# Altium PCB SSFocuser-B-TMC2208-O - 3.9x5.2.PcbDoc
Units mm, origin at the board's own origin, x right, y up, seen from the top; angles counter-clockwise.
Board outline 52 x 39 mm, 2 copper layers (Top Layer, Bottom Layer); 47 components, 44 nets, 214 pads, 52 vias.
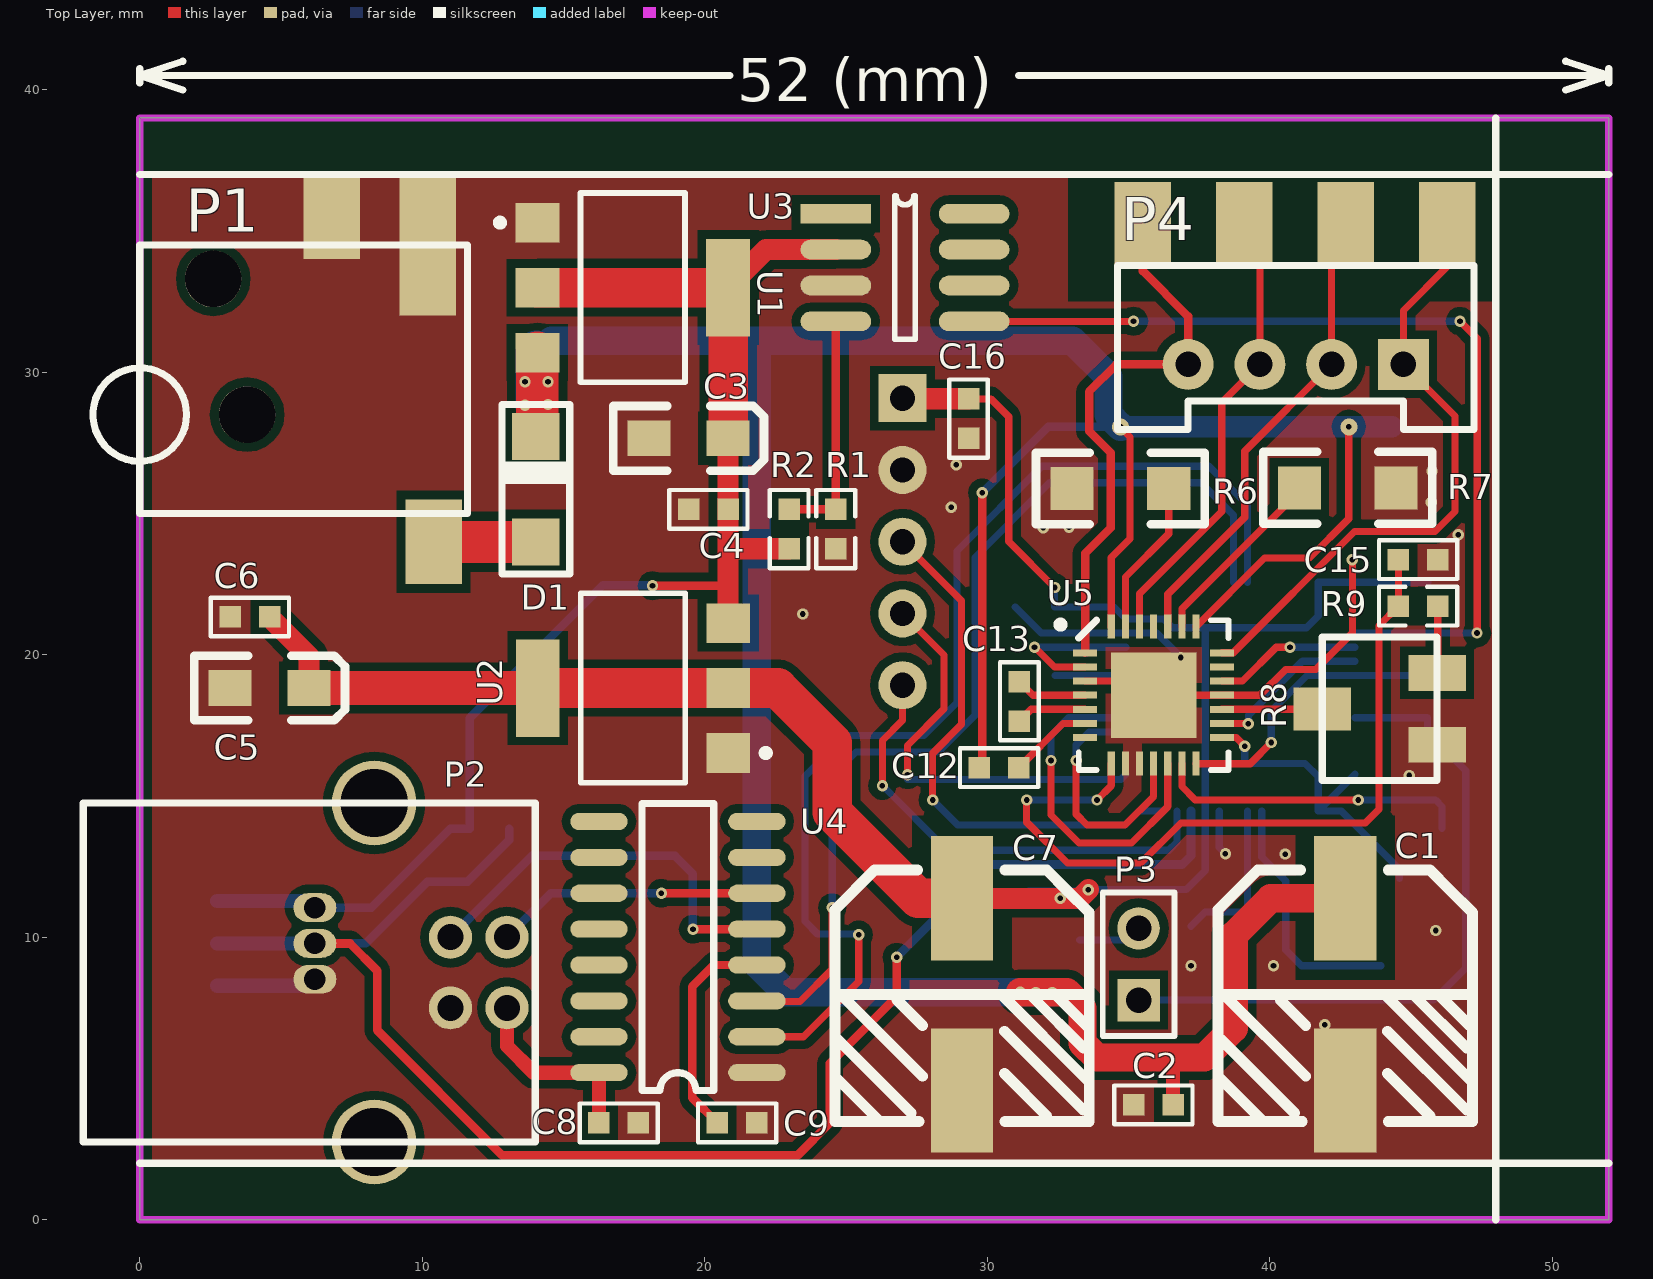
[diagram p0: Top Layer view]
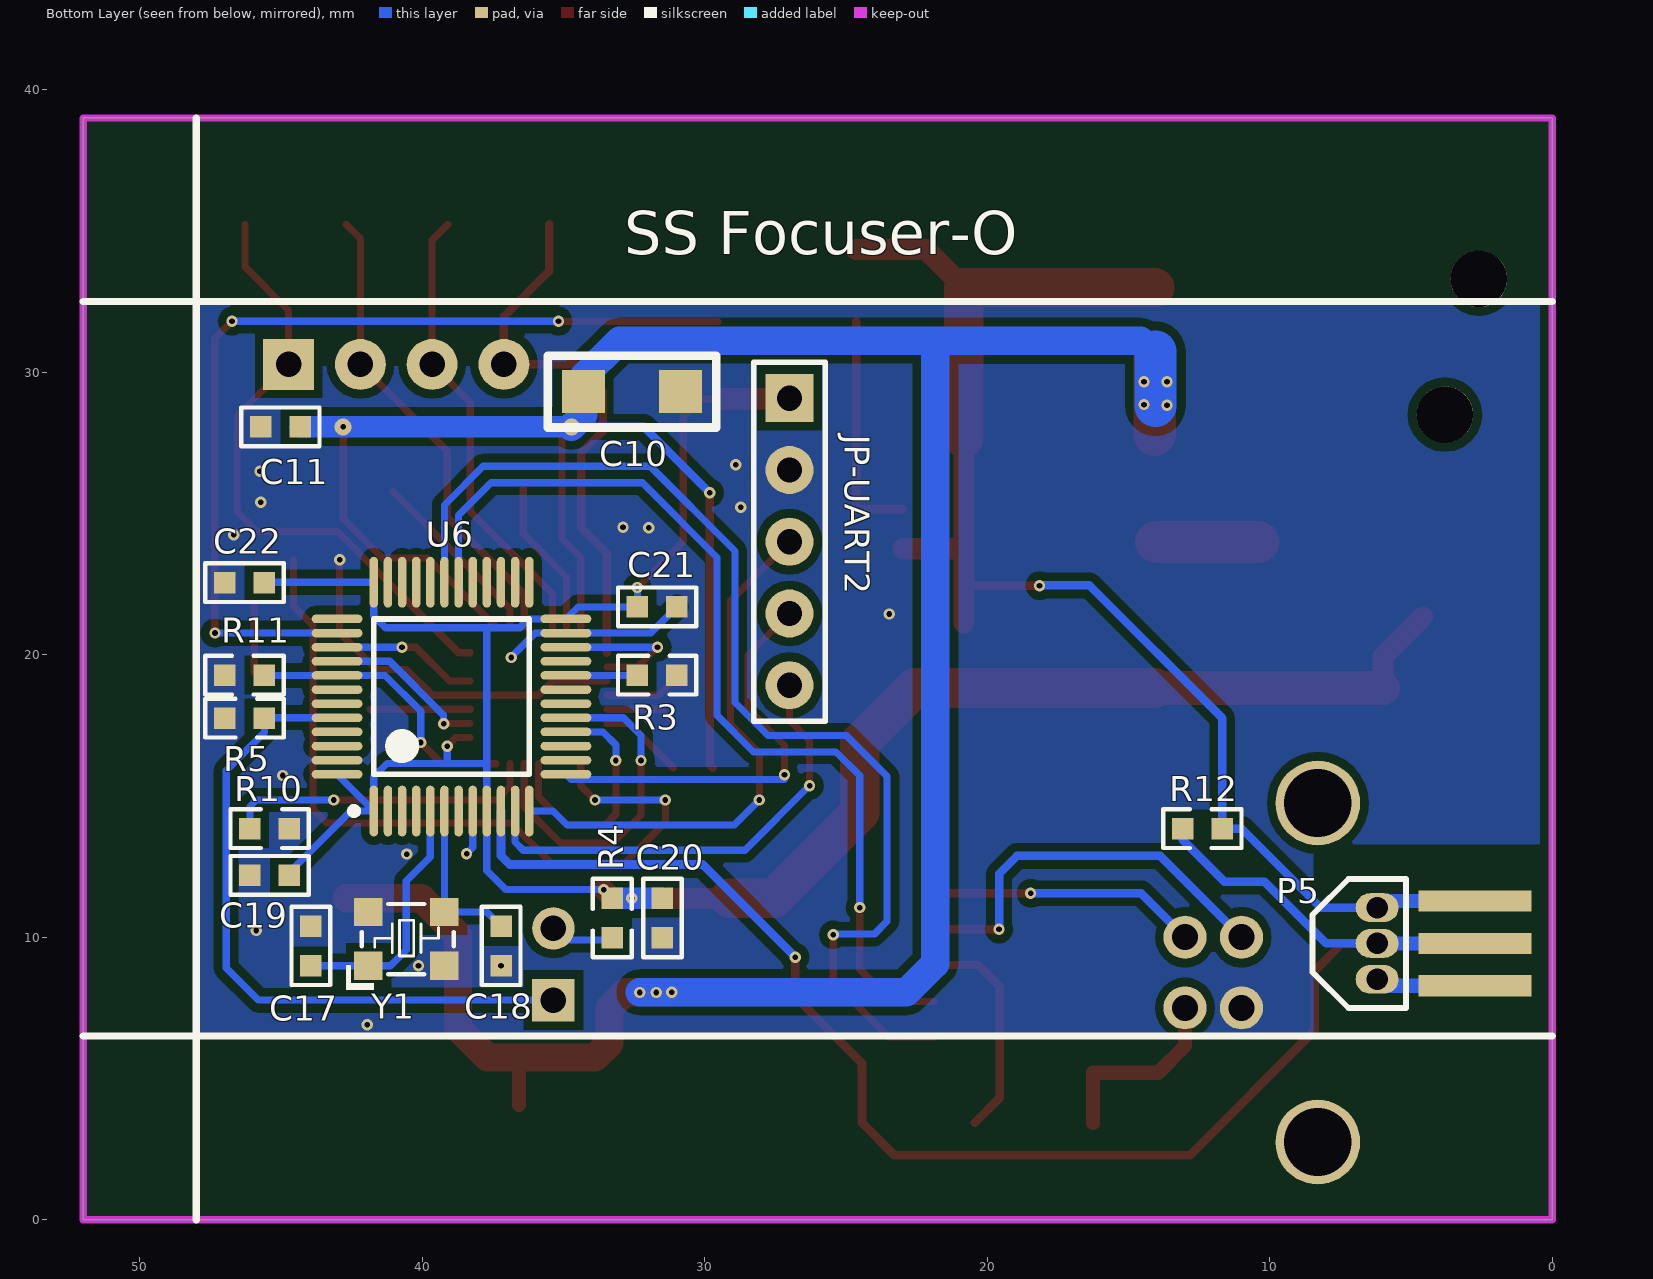
[diagram p1: Bottom Layer view, seen from below]

## Layer stack, top to bottom
Top Solder: solder mask 0.0102, Solder Resist, Dk 3.5
Top Layer: signal copper 0.0356
Dielectric1: dielectric 0.32, FR-4, Dk 4.8
Bottom Layer: signal copper 0.0356
Bottom Solder: solder mask 0.0102, Solder Resist, Dk 3.5

## Board outline
0,0 0,39 52,39 52,0

## Design rules (kind name [scope] priority, off if disabled: settings)
Clearance Clearance_pyog [InPolygon] p1: gap=0.305
Clearance Clearance_mcu [InComponentClass('U7')] p2: gap=0.178
Clearance [All] p3: gap=0.178
HoleSize [All] p1: absolutevalues=TRUE maxlimit=25.4 minlimit=0.025 maxpercent=80.000 minpercent=20.000
MinimumSolderMaskSliver [All] p1: minsoldermaskwidth=0
PolygonConnect GNDVIA [IsVia] p1: connectstyle=Direct reliefconductorwidth=0.254 reliefentries=4 polygonreliefangle="90 Angle" airgapwidth=0.254
PolygonConnect [All] p2: connectstyle=Direct reliefconductorwidth=0.254 reliefentries=4 polygonreliefangle="90 Angle" airgapwidth=0.254
RoutingVias [All] p1: holewidth=0.711 width=1.27 viastyle="Through Hole" minholewidth=0.3 minwidth=0.45 maxholewidth=0.711 maxwidth=1.27
SilkToSilkClearance [All] p1: silktosilkclearance=0
SilkToSolderMaskClearance [IsPad] p1: minsilkscreentomaskgap=0 clearancetoexposedcopper=TRUE
SolderMaskExpansion [All] p1: expansion=0.102
Width [All] p1: maxlimit=2 minlimit=0.254 preferedwidth=0.254
25 further rules are at their usual default settings.

## Components (designator, comment, footprint, x,y, rotation, side; value= is the part's Value field where it differs from the comment)
C1 "470uF" 16V/470U(CD10X10D5) 42.672,7.976 r270 top locked
C2 "100nF" 0603C#1 35.179,4.064 r0 top
C3 "10uF" 3216 20.828,27.661 r0 top
C4 "100nF" 0603C#1 19.431,25.146 r0 top
C5 "10uF" 3216 5.994,18.821 r0 top
C6 "100nF" 0603C#1 3.2,21.336 r0 top
C7 "1000uF" 16V/470U(CD10X10D5) 29.108,7.976 r270 top locked
C8 "100nF" 0603C#1 17.653,3.429 r180 top
C9 "100nF" 0603C#1 21.844,3.429 r180 top
C10 "1uF" 1206C 34.29,29.312 r0 bottom
C11 "100nF" 0603C#2 45.72,28.067 r0 bottom
C12 "100nF" 0603C#1 31.115,16.002 r180 top
C13 "22nF" 0603C#1 31.14,17.653 r90 top
C15 "2.2~4.7uF" 0603C#1 45.949,23.368 r180 top
C16 "100nF" 0603C#1 29.337,27.661 r90 top
C17 "20pF" 0603C#1 43.942,8.992 r90 bottom
C18 "20pF" 0603C#1 37.211,10.389 r270 bottom
C19 "100nF" 0603C#1 46.101,12.192 r180 bottom
C20 "100nF" 0603C#1 31.496,9.982 r90 bottom
C21 "100nF" 0603C#1 30.988,21.692 r0 bottom
C22 "100nF" 0603C#1 46.99,22.555 r180 bottom
D1 "M7" DO-214AC 14.021,25.857 r90 top locked
JP-UART2 "HDR-1X5" HDR2.54-LI-5P 27,24 r270 bottom locked
P1 "SOURCE" DC005 0,25 r0 top locked
P2 "USB-B" USB-B 13,7.5 r0 top locked
P3 "BOOT0" HDR1X2 35.357,7.772 r90 top
P4 "Header 4" XH_4_V 44.729,30.277 r180 top locked
P5 "DS18B20" TO-92B 6.198,11.049 r270 bottom
R1 "2K" 0603R 24.638,25.146 r270 top
R2 "4.7K" 0603R 22.987,25.146 r270 top
R3 "10K" 0603R 30.988,19.279 r0 bottom
R4 "4.7K" 0603R 33.274,9.982 r90 bottom
R5 "10K" 0603R 45.593,17.755 r0 bottom
R6 "0.18Ω" 1206R#1 32.995,25.883 r180 top
R7 "0.18Ω" 1206R#2 44.475,25.908 r180 top
R8 "RPot" VR_SMD 43.891,18.085 r270 top
R9 "20K" 0603R 44.552,21.717 r0 top
R10 "20K" 0603R 44.704,13.843 r0 bottom
R11 "20K" 0603R 46.99,19.279 r180 bottom
R12 "4.7K" 0603R 13.081,13.843 r180 bottom
U1 "AMS1117-5.0" SOT223 17.45,32.995 r270 top locked
U2 "AMS1117-3.3" SOT223 17.46,18.821 r90 top locked
U3 "MAX813LCSA" SOP-8 24.638,35.611 r0 top locked
U4 "CH340C" SO-16 21.844,5.207 r180 top locked
U5 "TMC2208" QFN28 35.89,18.567 r180 top
U6 "STM32F103C8T6" LQFP48_N 38.964,18.517 r180 bottom locked
Y1 "8MHz  无源" X3225 41.885,8.966 r180 bottom locked (schematic designator Y2)

## Footprints (in the part's own frame and the unit in brackets; to place one, negate y for a bottom-side part, rotate by r counter-clockwise, add the part's x,y. Pads: shape width x height; smd on the part's side, far side on the other; paste and mask are expansions set on the pad)
16V/470U(CD10X10D5) [mm] "取自《FE-3AD》"
  rect 4.4x2.2 smd: 1(-3.4,0) 2(3.4,0)
  Top Layer pour cut-out: -6.35,1.778 -0.508,1.778 -0.508,-1.778 -6.35,-1.778
  silkscreen extent -4.4,-4.5 4.5,4.5
0603C#1 [mil]
  rect 30x30 smd: 1(0,0) 2(55,0)
  silkscreen extent -27,-27 82,27, body extent -4,-16 58,16, height 12
0603C#2 [mil]
  rect 30x30 smd: 1(0,0) 2(-55,0)
  silkscreen extent -82,-27 27,27, body extent -58,-16 4,16, height 12
0603R [mil]
  rect 30x30 smd: 1(0,0) 2(55,0)
  silkscreen extent -27,-27 82,27, body extent -4,-18 58,16, height 18
1206C [mil]
  rect 60x60 smd: 1(0,0) 2(-135,0)
  silkscreen extent -185,-50 50,50, body extent -132,-29 -6,33, height 40
1206R#1 [mil]
  rect 60x60 smd: 1(0,0) 2(-135,0)
  silkscreen extent -185,-50 50,50, body extent -131,-30 -5,32, height 22
1206R#2 [mil]
  rect 60x60 smd: 1(0,0) 2(135,0)
  silkscreen extent -50,-50 185,50, body extent 5,-32 131,30, height 22
3216 [mil]
  rect 60x50 smd: 1(0,0) 2(-110,0)
  silkscreen extent -160,-45 50,45, body extent -151,-35 38,36, height 73
DC005 [mm] "贴片5.5-2.1"
  rect 2x3 smd: 1(10.4,-1) 3(6.8,10.5)
  rect 2x5 smd: 2(10.2,9.5)
  round 2 hole 2: 5(2.6,8.3) 5(3.8,3.5)
  silkscreen extent -1.65,0 11.6,9.5
DO-214AC [mm]
  rect 1.655x1.67 smd: 1(1.865,0) 2(-1.865,0)
  silkscreen extent -3,-1.2 3,1.2, body extent -2.74,-1.4 2.74,1.4, height 2.3
HDR1X2 [mm] "Connector; Header; 2 Position"
  rect 1.5x1.5 hole 0.9: 1(0,0)
  round 1.5 hole 0.9: 2(2.54,0)
  silkscreen extent -1.27,-1.27 3.81,1.27, body extent -1.27,-1.27 3.81,1.27, height 7.58
HDR2.54-LI-5P [mm] "排针，5脚"
  rect 1.7x1.7 hole 0.9: 1(-5.08,0)
  round 1.7 hole 0.9: 2(-2.54,0) 3(0,0) 4(2.54,0) 5(5.08,0)
  silkscreen extent -6.35,-1.27 6.35,1.27, body extent -6.35,-1.27 6.35,1.27, height 8.5
LQFP48_N [mm]
  oval 0.3x1.8 smd: 1(-2.75,-4.05) 2(-2.25,-4.05) 3(-1.75,-4.05) 4(-1.25,-4.05) 5(-0.75,-4.05) 6(-0.25,-4.05) 7(0.25,-4.05) 8(0.75,-4.05) 9(1.25,-4.05) 10(1.75,-4.05) 11(2.25,-4.05) 12(2.75,-4.05) 25(2.75,4.05) 26(2.25,4.05) 27(1.75,4.05) 28(1.25,4.05) 29(0.75,4.05) 30(0.25,4.05) 31(-0.25,4.05) 32(-0.75,4.05) 33(-1.25,4.05) 34(-1.75,4.05) 35(-2.25,4.05) 36(-2.75,4.05)
  oval 1.8x0.3 smd: 13(4.05,-2.75) 14(4.05,-2.25) 15(4.05,-1.75) 16(4.05,-1.25) 17(4.05,-0.75) 18(4.05,-0.25) 19(4.05,0.25) 20(4.05,0.75) 21(4.05,1.25) 22(4.05,1.75) 23(4.05,2.25) 24(4.05,2.75) 37(-4.05,2.75) 38(-4.05,2.25) 39(-4.05,1.75) 40(-4.05,1.25) 41(-4.05,0.75) 42(-4.05,0.25) 43(-4.05,-0.25) 44(-4.05,-0.75) 45(-4.05,-1.25) 46(-4.05,-1.75) 47(-4.05,-2.25) 48(-4.05,-2.75)
  silkscreen extent -3.58,-4.17 2.75,2.75, body extent -4.5,-4.5 4.5,4.5, height 1.5
QFN28 [mm] "5mm*5mm（蒜米工坊）"
  rect 0.85x0.25 smd: 1(2.425,-1.5) 2(2.425,-1) 3(2.425,-0.5) 4(2.425,0) 5(2.425,0.5) 6(2.425,1) 7(2.425,1.5) 15(-2.425,1.5) 16(-2.425,1) 17(-2.425,0.5) 18(-2.425,0) 19(-2.425,-0.5) 20(-2.425,-1) 21(-2.425,-1.5)
  rect 0.25x0.85 smd: 8(1.5,2.425) 9(1,2.425) 10(0.5,2.425) 11(0,2.425) 12(-0.5,2.425) 13(-1,2.425) 14(-1.5,2.425) 22(-1.5,-2.425) 23(-1,-2.425) 24(-0.5,-2.425) 25(0,-2.425) 26(0.5,-2.425) 27(1,-2.425) 28(1.5,-2.425)
  rect 3.03x3.03 smd: 29(0,0)
  silkscreen extent -2.65,-2.65 3.42,2.65, body extent -2.55,-2.52 2.49,2.52, height 0.9
SO-16 [mil]
  oval 80x24 smd: 1(0,0) 2(0,-50) 3(0,-100) 4(0,-150) 5(0,-200) 6(0,-250) 7(0,-300) 8(0,-350) 9(220,-350) 10(220,-300) 11(220,-250) 12(220,-200) 13(220,-150) 14(220,-100) 15(220,-50) 16(220,0)
  silkscreen extent 60,-375 160,25, body extent -12,-377 226,29, height 77
SOP-8 [mm]
  rect 2.5x0.7 smd: 1(0,0)
  oval 2.5x0.7 smd: 2(0,-1.27) 3(0,-2.54) 4(0,-3.81) 5(4.9,-3.81) 6(4.9,-2.54) 7(4.9,-1.27) 8(4.9,0)
  silkscreen extent 2.08,-4.44 2.82,0.64, body extent -0.56,-4.44 5.48,0.58, height 1.6
SOT223 [mm] "SOT-223/SC-73; 4 Leads; Body 6.7 x 7.3 mm, inc. leads (LxW max)"
  rect 1.4x1.55 smd: 1(-2.3,-3.375) 2(0,-3.375) 3(2.3,-3.375)
  rect 3.45x1.55 smd: 4(0,3.375)
  silkscreen extent -3.35,-4.82 3.35,1.85, body extent -3.25,-3.53 3.25,3.43, height 1.7
TO-92B [mil]
  oval 40x60 hole 30: 1(0,0) 2(50,0) 3(100,0)
  silkscreen extent -40,-90 140,40
USB-B [mm]
  round 1.524 hole 0.92: 1(0,0) 2(0,2.5) 3(-2,2.5) 4(-2,0)
  round 3 hole 2.4: 5(-4.7,7.25) 6(-4.7,-4.75)
  silkscreen extent -15,-4.75 1,7.25
VR_SMD [mil]
  rect 50x80 smd: 1(50,80) 2(-50,80)
  rect 60x80 smd: 3(0,-80)
  silkscreen extent -100,-80 100,80
X3225 [mm]
  rect 1x1 smd: 1(-0.025,0.025) 2(2.667,0.025) 3(2.667,1.93) 4(-0.025,1.93)
  silkscreen extent -0.81,-0.84 3,2.21, body extent -0.23,-0.29 2.97,2.21, height 0.72
XH_4_V [mm]
  rect 1.8x1.8 hole 0.9: 1(0,0)
  round 1.8 hole 0.9: 2(2.54,0) 3(5.08,0) 4(7.62,0)
  silkscreen extent -2.5,-3.5 10.12,2.3, body extent -2.39,-3.35 10.01,2.75, height 7

## Part data
C1: library part C470UF016S, "470UF      16V      CD10X10D5"
C2 C4 C6 C8 C10 C11 C12 C13 C15 C16 C17 C18 C19 C20 C21 C22: library part Cap, "Capacitor"
C3 C5 C7: library part CAP2
C9: library part C
D1: library part Diode, "High Conductance Fast Diode"
JP-UART2: library part "Header 5", "5P接插件"
P3: library part MHDR1X2, "Header, 2-Pin"
P4: "Header, 4-Pin"
P5: library part "Header 3", "Header, 3-Pin"
R1 R2 R5 R6 R7 R9 R10 R11 R12: library part RES, "Resistor"
R3 R4: library part R
R8: "Potentiometer"
U1 U2: library part AMS1117
U3: library part MAX813L
U4: library part CH340G, "USB2UART"
U6: "STM32 ARM-based 32-bit MCU Performance Line with 64 kB Flash, 20 kB Internal RAM, -40 to +85癈 Temperature, 48-Pin LQFP, Tray"
Y1: library part XTAL_1, "Crystal Oscillator"

## Free pads (board coordinates)
  rect 4x0.75 smd far side: 1(2.743,8.28) 1(2.743,9.779) 1(2.743,11.278)
  rect 2x3 smd: 2(35.509,35.23) 2(39.099,35.23) 2(42.689,35.23) 2(46.279,35.23)

## Via types
v1: diameter 0.4, hole 0.2, Top Layer to Bottom Layer, 50 vias
v2: diameter 0.6, hole 0.2, Top Layer to Bottom Layer, 2 vias

## Nets (pads, with @x,y where several pads share a name; then routed paths per layer and width w, separated by ;. In a path a pad name is that pad's centre, name@x,y a point inside that pad or via, vN(x,y) a via of type N, cw(c..) or ccw(c..) an arc to the next point about the centre after c; other vN are vias at no path point)
A1: P4.2 pad.2@42.689,35.23 U5.24 | length 16.8
  Top Layer w0.254: U5.24 36.39,22.141 39.116,24.867 39.116,27.203 P4.2 42.189,34.73 pad.2@42.689,35.23
A2: P4.1 pad.2@46.279,35.23 U5.21 | length 21.9
  Top Layer w0.254: U5.21 38.711,20.067 43.002,24.359 45.847,24.359 46.558,25.07 46.558,28.448 P4.1 44.729,32.182 46.279,33.731 pad.2@46.279,35.23
B1: P4.3 pad.2@39.099,35.23 U5.26 | length 16.2
  Top Layer w0.254: U5.26 35.39,22.157 38.303,25.07 38.303,28.931 P4.3 39.649,34.679 pad.2@39.099,35.23
B2: P4.4 pad.2@35.509,35.23 U5.1 | length 19.5
  Top Layer w0.3: U5.1 33.465,23.585 34.366,24.486 34.366,27.153 33.604,27.915 33.604,29.312 34.569,30.277 P4.4 37.109,31.979 35.509,33.579 pad.2@35.509,35.23
BOOT0: P3.1 R5.1 U6.44 | length 24
  Bottom Layer w0.254: P3.1 45.796,7.772 46.939,8.915 46.939,15.9 45.581,17.259 45.581,17.767 U6.44
BOOT1: R3.2 U6.20 | length 2.5
  Bottom Layer w0.254: R3.2@32.397,19.267 U6.20
D3V3: C5.1 C6.2 C7.1 C16.2 C19.2 C20.2 C21.2 C22.2 JP-UART2.1 R4.2 U2.2 U2.4 U5.15 U6.1 U6.9 U6.24 U6.36 U6.48 | length 89.1
  Top Layer w0.254: C16.2 30.124,29.058 30.759,28.423 30.759,24.006 v1(32.385,22.38) ; U5.15 38.813,17.067 v1(39.116,16.764)
  Top Layer w0.75: C6.2 5.994,19.939 C5.1 ; JP-UART2.1@27.022,29.058 C16.2 ; C7.1 33.27,11.376 v1(33.579,11.684)
  Top Layer w1.2: C5.1 U2.4
  Top Layer w1.4: U2.4 U2.2 22.581,18.821 24.511,16.891 24.511,14.427 27.563,11.376 C7.1
  Bottom Layer w0.254: v1(32.385,22.38) C21.2 34.489,21.692 U6.24 36.239,21.267 36.551,20.955 41.3,20.955 41.714,21.368 U6.36 C22.2@45.593,22.567 ; v1(33.579,11.684) 37.033,11.684 37.714,12.364 U6.9 37.714,16.154 ; 37.714,20.95 37.714,16.154 ; 39.116,16.18 v1(39.116,16.764) ; U6.48 U6.1 ; C19.2@44.59,12.078 44.59,12.408 42.531,14.467 U6.1 ; 37.714,16.154 41.25,16.154 41.714,15.69 U6.1
  Bottom Layer w0.75: C20.2 R4.2@33.198,11.379
  other v1: 32.588,11.376
D5V0: C3.1 C4.2 P5.1 pad.1@2.743,11.278 R2.2 R12.2 U1.2 U1.4 U2.3 U3.2 | length 50.2
  Top Layer w0.3: v1(18.15,22.443) 20.792,22.443
  Top Layer w0.75: U1.4 22.171,34.341 U3.2 ; U2.3@20.828,21.128 C4.2 C3.1 ; 20.904,23.749 R2.2
  Top Layer w1.4: U1.2 U1.4 ; C3.1 U1.4@20.828,32.991
  Bottom Layer w0.3: P5.1 8.204,11.049 10.998,13.843 R12.2 11.684,17.755 16.383,22.454 v1@18.15,22.454
  Bottom Layer w0.5: pad.1@2.743,11.278 5.969,11.278 P5.1
D12V0: C1.1 C2.2 C10.1 C11.2 C12.2 D1.1 U1.3 U5.22 U5.28 | length 122.8
  Top Layer w0.254: U5.28 34.39,23.443 35.052,24.105 35.052,27.711 v2@34.696,28.067 ; U5.22 39.817,23.419 41.402,23.419 42.799,24.816 v2(42.799,28.067)
  Top Layer w0.3: C12.2 29.82,16.104 v1(29.82,25.731)
  Top Layer w0.5: C2.2 36.576,5.715
  Top Layer w1: v1(31.166,8.052) 32.817,8.052 33.376,7.493 33.376,6.248 33.884,5.74 37.694,5.74 38.735,6.782 38.735,10.084 40.027,11.376 C1.1
  Top Layer w1.5: D1.1@14.075,27.776 U1.3
  Bottom Layer w0.3: v1(29.82,25.731) 32.156,28.067 v2(34.722,28.067)
  Bottom Layer w0.75: v2(34.722,28.067) v2(42.799,28.067) C11.2
  Bottom Layer w1: 14.046,30.582 14.58,31.115 33.02,31.115 34.29,29.845 34.29,28.499 v2(34.722,28.067) ; 21.844,31.115 21.844,9.063 22.855,8.052 v1@32.309,8.052
  Bottom Layer w1.5: 14.046,28.804 14.046,30.734
  other v1: 31.714,8.041 32.298,8.041 13.64,28.829 14.453,28.854 13.64,29.667 14.453,29.667
DIAG: U5.11 U6.16 | length 8.9
  Top Layer w0.254: v1(33.147,16.256) 33.147,14.351 33.528,13.97 34.874,13.97 35.89,14.986 U5.11
  Bottom Layer w0.254: v1(33.147,16.256) 33.147,16.815 33.599,17.267 U6.16
DIR: U5.19 U6.39 | length 5.2
  Top Layer w0.254: U5.19 39.032,19.067 40.231,20.267 v1@40.716,20.267
  Bottom Layer w0.254: v1@40.716,20.267 U6.39
  other v1: 40.716,20.269
DOWN: 
EN: U5.2 U6.22 | length 5.3
  Top Layer w0.254: v1(31.674,20.269) 32.376,19.567 U5.2
  Bottom Layer w0.254: v1(31.674,20.269) 31.676,20.267 U6.22
GND: C1.2 C2.1 C3.2 C4.1 C5.2 C6.1 C7.2 C8.1 C9.1 C10.2 C11.1 C15.1 C16.1 C17.2 C18.2 C19.1 C20.1 C21.1 C22.1 JP-UART2.2 P1.2 P1.3 P2.4 P5.3 pad.1@2.743,8.28 R1.2 R3.1 R5.2 R6.1 R7.1 R8.1 R10.1 R11.1 U1.1 U2.1 U3.3 U4.1 U5.3 U5.9 U5.10 U5.18 U5.29 U6.8 U6.23 U6.35 U6.47 Y1.2 Y1.4 | length 24.9
  Top Layer w0.254: U5.3 35.39,19.067 U5.29 U5.18 39.649,18.567 40.564,19.482 41.631,19.482 42.926,20.777 v1@42.926,23.368
  Bottom Layer w0.254: P5.3@5.969,8.28 P5.3 ; C21.1 31.913,20.767 U6.23 36.002,20.767 v1@36.855,19.914 ; U6.8 38.214,13.173 v1(38.43,12.957)
  Bottom Layer w0.5: pad.1@2.743,8.28 P5.3@5.969,8.28
  other v1: 41.95,6.898 37.211,8.992 40.132,8.992 45.872,10.236 40.553,12.943 44.933,15.723 36.845,19.903 23.47,21.44 42.915,23.357 46.675,24.246 31.987,24.493 32.893,24.511 28.727,25.225 45.72,25.4 45.745,26.492 28.905,26.723
INDEX: U5.12 U6.17 | length 12.3
  Top Layer w0.254: v1(32.258,16.256) 32.258,14.326 33.249,13.335 35.103,13.335 36.39,14.622 U5.12
  Bottom Layer w0.254: v1(32.258,16.256) 32.258,17.145 32.88,17.767 U6.17
NetC9_2: C9.2 U4.4 | length 7.8
  Top Layer w0.3: C9.2 19.558,4.318 19.558,8.255 20.32,9.017 U4.4
NetC12_1: C12.1 U5.6 | length 3
  Top Layer w0.254: C12.1 32.68,17.567 U5.6
NetC13_1: C13.1 U5.5 | length 2.5
  Top Layer w0.254: C13.1 31.555,18.067 U5.5
NetC13_2: C13.2 U5.4 | length 2.5
  Top Layer w0.254: C13.2 31.623,18.567 U5.4
NetC15_2: C15.2 R9.1 U5.8 | length 27.8
  Top Layer w0.254: v1(31.394,14.859) 31.394,14.072 32.842,12.624 35.433,12.624 36.855,14.046 43.383,14.046 43.866,14.529 43.866,21.031 R9.1 C15.2 ; v1(33.884,14.859) 34.39,15.366 U5.8
  Bottom Layer w0.254: v1(31.394,14.859) v1(33.884,14.859)
NetD1_1: D1.2 P1.1 | length 3.6
  Top Layer w1.5: P1.1@10.408,23.992 D1.2
NetP2_2: P2.2 U4.6 | length 9.5
  Top Layer w0.3: v1(18.466,11.557) U4.6
  Bottom Layer w0.3: P2.2 14.557,11.557 v1(18.466,11.557)
NetP2_3: P2.3 U4.5 | length 14.3
  Top Layer w0.3: v1(19.583,10.287) U4.5
  Bottom Layer w0.3: P2.3 13.878,12.878 18.948,12.878 19.583,12.243 v1(19.583,10.287)
NetP3_2: P3.2 R4.1 | length 2.3
  Bottom Layer w0.254: R4.1@33.274,9.906 34.95,9.906 P3.2
NetR1_1: R1.1 R2.1 U3.4 | length 8.3
  Top Layer w0.3: R2.1 R1.1 U3.4
NetR6_2: R6.2 U5.27 | length 5.5
  Top Layer w0.254: U5.27 34.89,22.749 36.424,24.282 R6.2
NetR7_2: R7.2 U5.23 | length 6.5
  Top Layer w0.254: U5.23 36.89,21.625 R7.2@41.046,25.781
NetR8_2: R8.2 R9.2 | length 2.3
  Top Layer w0.254: R8.2@45.949,19.38 R9.2
NetR10_2: R10.2 U5.13 | length 11.1
  Top Layer w0.254: U5.13 36.89,15.333 37.364,14.859 v1(43.129,14.859)
  Bottom Layer w0.254: v1(43.129,14.859) 45.872,14.859 46.101,14.63 R10.2
OSC_IN: C17.1 U6.5 Y1.1 | length 8.9
  Bottom Layer w0.254: U6.5 39.714,12.839 40.564,11.989 40.564,9.55 41.123,8.992 Y1.1 C17.1
OSC_OUT: C18.1 U6.6 Y1.3 | length 5.8
  Bottom Layer w0.254: C18.1 37.719,10.897 Y1.3 ; Y1.3@39.214,10.901 U6.6
PDN: R11.2 U5.14 U6.41 | length 10.1
  Top Layer w0.254: U5.14 39.307,16.142 v1(40.056,16.891)
  Bottom Layer w0.254: v1(40.056,16.891) 40.056,18.009 41.314,19.267 U6.41 R11.2@45.581,19.267
PFO: U3.5 U6.38 | length 32.8
  Top Layer w0.254: U3.5 v1@35.179,31.801 ; v1(46.733,31.806) 47.346,31.194 v1@47.346,20.777
  Bottom Layer w0.254: v1(35.179,31.803) v1@46.733,31.803 ; U6.38 v1(47.335,20.767)
RESET: U6.7
RXD: U4.3 U6.30 | length 34.6
  Top Layer w0.254: U4.3@21.869,7.722 23.368,7.722 24.511,8.865 v1(24.511,11.049)
  Bottom Layer w0.254: v1(24.511,11.049) 24.511,15.723 25.349,16.561 28.27,16.561 29.566,17.856 29.566,23.444 32.207,26.086 37.567,26.086 38.714,24.939 U6.30
RXD2: JP-UART2.3 U6.12 | length 19.1
  Top Layer w0.254: JP-UART2.3 29.083,21.917 29.083,17.526 28.067,16.51 v1(28.067,14.859)
  Bottom Layer w0.254: v1(28.067,14.859) 28.956,13.97 34.874,13.97 35.371,14.467 U6.12
SET: JP-UART2.5 U6.11 | length 16.4
  Top Layer w0.254: v1(26.289,15.367) 26.289,16.967 27,17.678 JP-UART2.5
  Bottom Layer w0.254: v1(26.289,15.367) 28.575,13.081 36.424,13.081 36.714,13.371 U6.11
STEP: U5.16 U6.40 | length 5.8
  Top Layer w0.254: U5.16 v1@39.227,17.567
  Bottom Layer w0.254: v1(39.243,17.551) 39.243,17.856 41.153,19.767 U6.40
TEMP: P5.2 pad.1@2.743,9.779 R12.1 U6.10 | length 55.6
  Top Layer w0.305: P5.2 7.442,9.779 8.407,8.814 8.407,6.706 12.827,2.286 23.292,2.286 24.435,3.429 24.435,5.537 26.797,7.899 v1(26.797,9.296)
  Bottom Layer w0.3: P5.2 8.001,9.779 10.185,11.963 11.608,11.963 13.081,13.437 R12.1
  Bottom Layer w0.305: v1(26.797,9.296) 30.074,12.573 36.906,12.573 37.214,12.88 U6.10
  Bottom Layer w0.5: pad.1@2.743,9.779 P5.2
TXD: U4.2 U6.31 | length 39.9
  Top Layer w0.254: U4.2 23.495,6.477 25.451,8.433 v1(25.451,10.084)
  Bottom Layer w0.254: v1@25.451,10.109 24.003,10.109 23.546,10.566 23.546,15.697 24.994,17.145 27.762,17.145 28.931,18.313 28.931,23.673 31.928,26.67 37.846,26.67 39.214,25.302 U6.31
TXD2: JP-UART2.4 U6.13 | length 14.7
  Top Layer w0.254: JP-UART2.4 28.473,19.987 28.473,18.085 27.178,16.789 v1(27.178,15.748)
  Bottom Layer w0.254: v1@27.178,15.589 34.736,15.589 U6.13
UP: 
VBUS: C8.2 P2.1 U4.16 | length 6.8
  Top Layer w0.508: P2.1 13,6.152 13.945,5.207 U4.16 C8.2
VREF: R8.3 U5.17 | length 3.5
  Top Layer w0.254: U5.17@38.303,18.067 R8.3@41.842,18.067
pads on no net: P1.5 P2.5 P2.6 U3.1 U3.6 U3.7 U3.8 U4.7 U4.8 U4.9 U4.10 U4.11 U4.12 U4.13 U4.14 U4.15 U5.7 U5.20 U5.25 U6.2 U6.3 U6.4 U6.14 U6.15 U6.18 U6.19 U6.21 U6.25 U6.26 U6.27 U6.28 U6.29 U6.32 U6.33 U6.34 U6.37 U6.42 U6.43 U6.45 U6.46

## Polygon pours and split planes (outlines as drawn)
GND on Bottom Layer "Bottom Layer-No Net" (solid, remove dead copper, pour order 14): 0.025,6.502 0.127,6.604 0.127,32.436 47.904,32.436 48.057,32.588 48.006,32.537 48.006,6.452
GND on Top Layer "Bottom Layer-No Net" (solid, remove dead copper, pour order 16): 0,1.981 0,36.957 0.064,37.02 48.019,37.02 48.019,2.019 47.981,1.981

## Keep-outs
Keep-Out Layer:
  the board outline again, w0.254

## Other copper
Top Layer:
  pour cut-out: 32.842,37.033 32.842,32.461 32.868,32.487 48.006,32.487 48.006,37.008 48.031,37.033
Bottom Layer:
  pour cut-out: 0,6.528 0.025,6.502 8.458,6.502 8.458,13.259 8.433,13.284 -0.051,13.284

## Silkscreen, mask and mechanical layers (free items; w line width, h text height)
Top Overlay:
  lines w0.254: 0,2 52,2 ; 0,37 52,37 ; 0,40.246 0,40.754 ; 1.524,39.992 0,40.5 ; 1.524,41.008 0,40.5 ; 20.896,40.5 0,40.5 ; 31.104,40.5 52,40.5 ; 48,0 48,39 ; 50.476,39.992 52,40.5 ; 50.476,41.008 52,40.5 ; 52,40.246 52,40.754
  text "52 (mm)" at 21.15,39.586 h1.52
Bottom Overlay:
  lines w0.254: 0,6.5 52,6.5 ; 0,32.5 52,32.5 ; 48,0 48,39
  text "SS Focuser-O" at 32.842,34.17 h1.52

## Dimensions
52,39 to 52,0 on Top Overlay